# Altium PCB DAP-PCB-REV-2.PcbDoc (part 2 of 4)
Units mil, origin at the board's own origin, x right, y up, seen from the top; angles counter-clockwise.
Board outline 2165.35 x 2165.35 mil, 6 copper layers (Top Layer (Sig), L2 (GND), L3 (Sig), L4 (Sig), L5 (GND), Bottom Layer (Sig)), stack 34.252 mil thick; 270 components, 172 nets, 891 pads, 299 vias.
Unrouted connection lines stored in the file: 138.
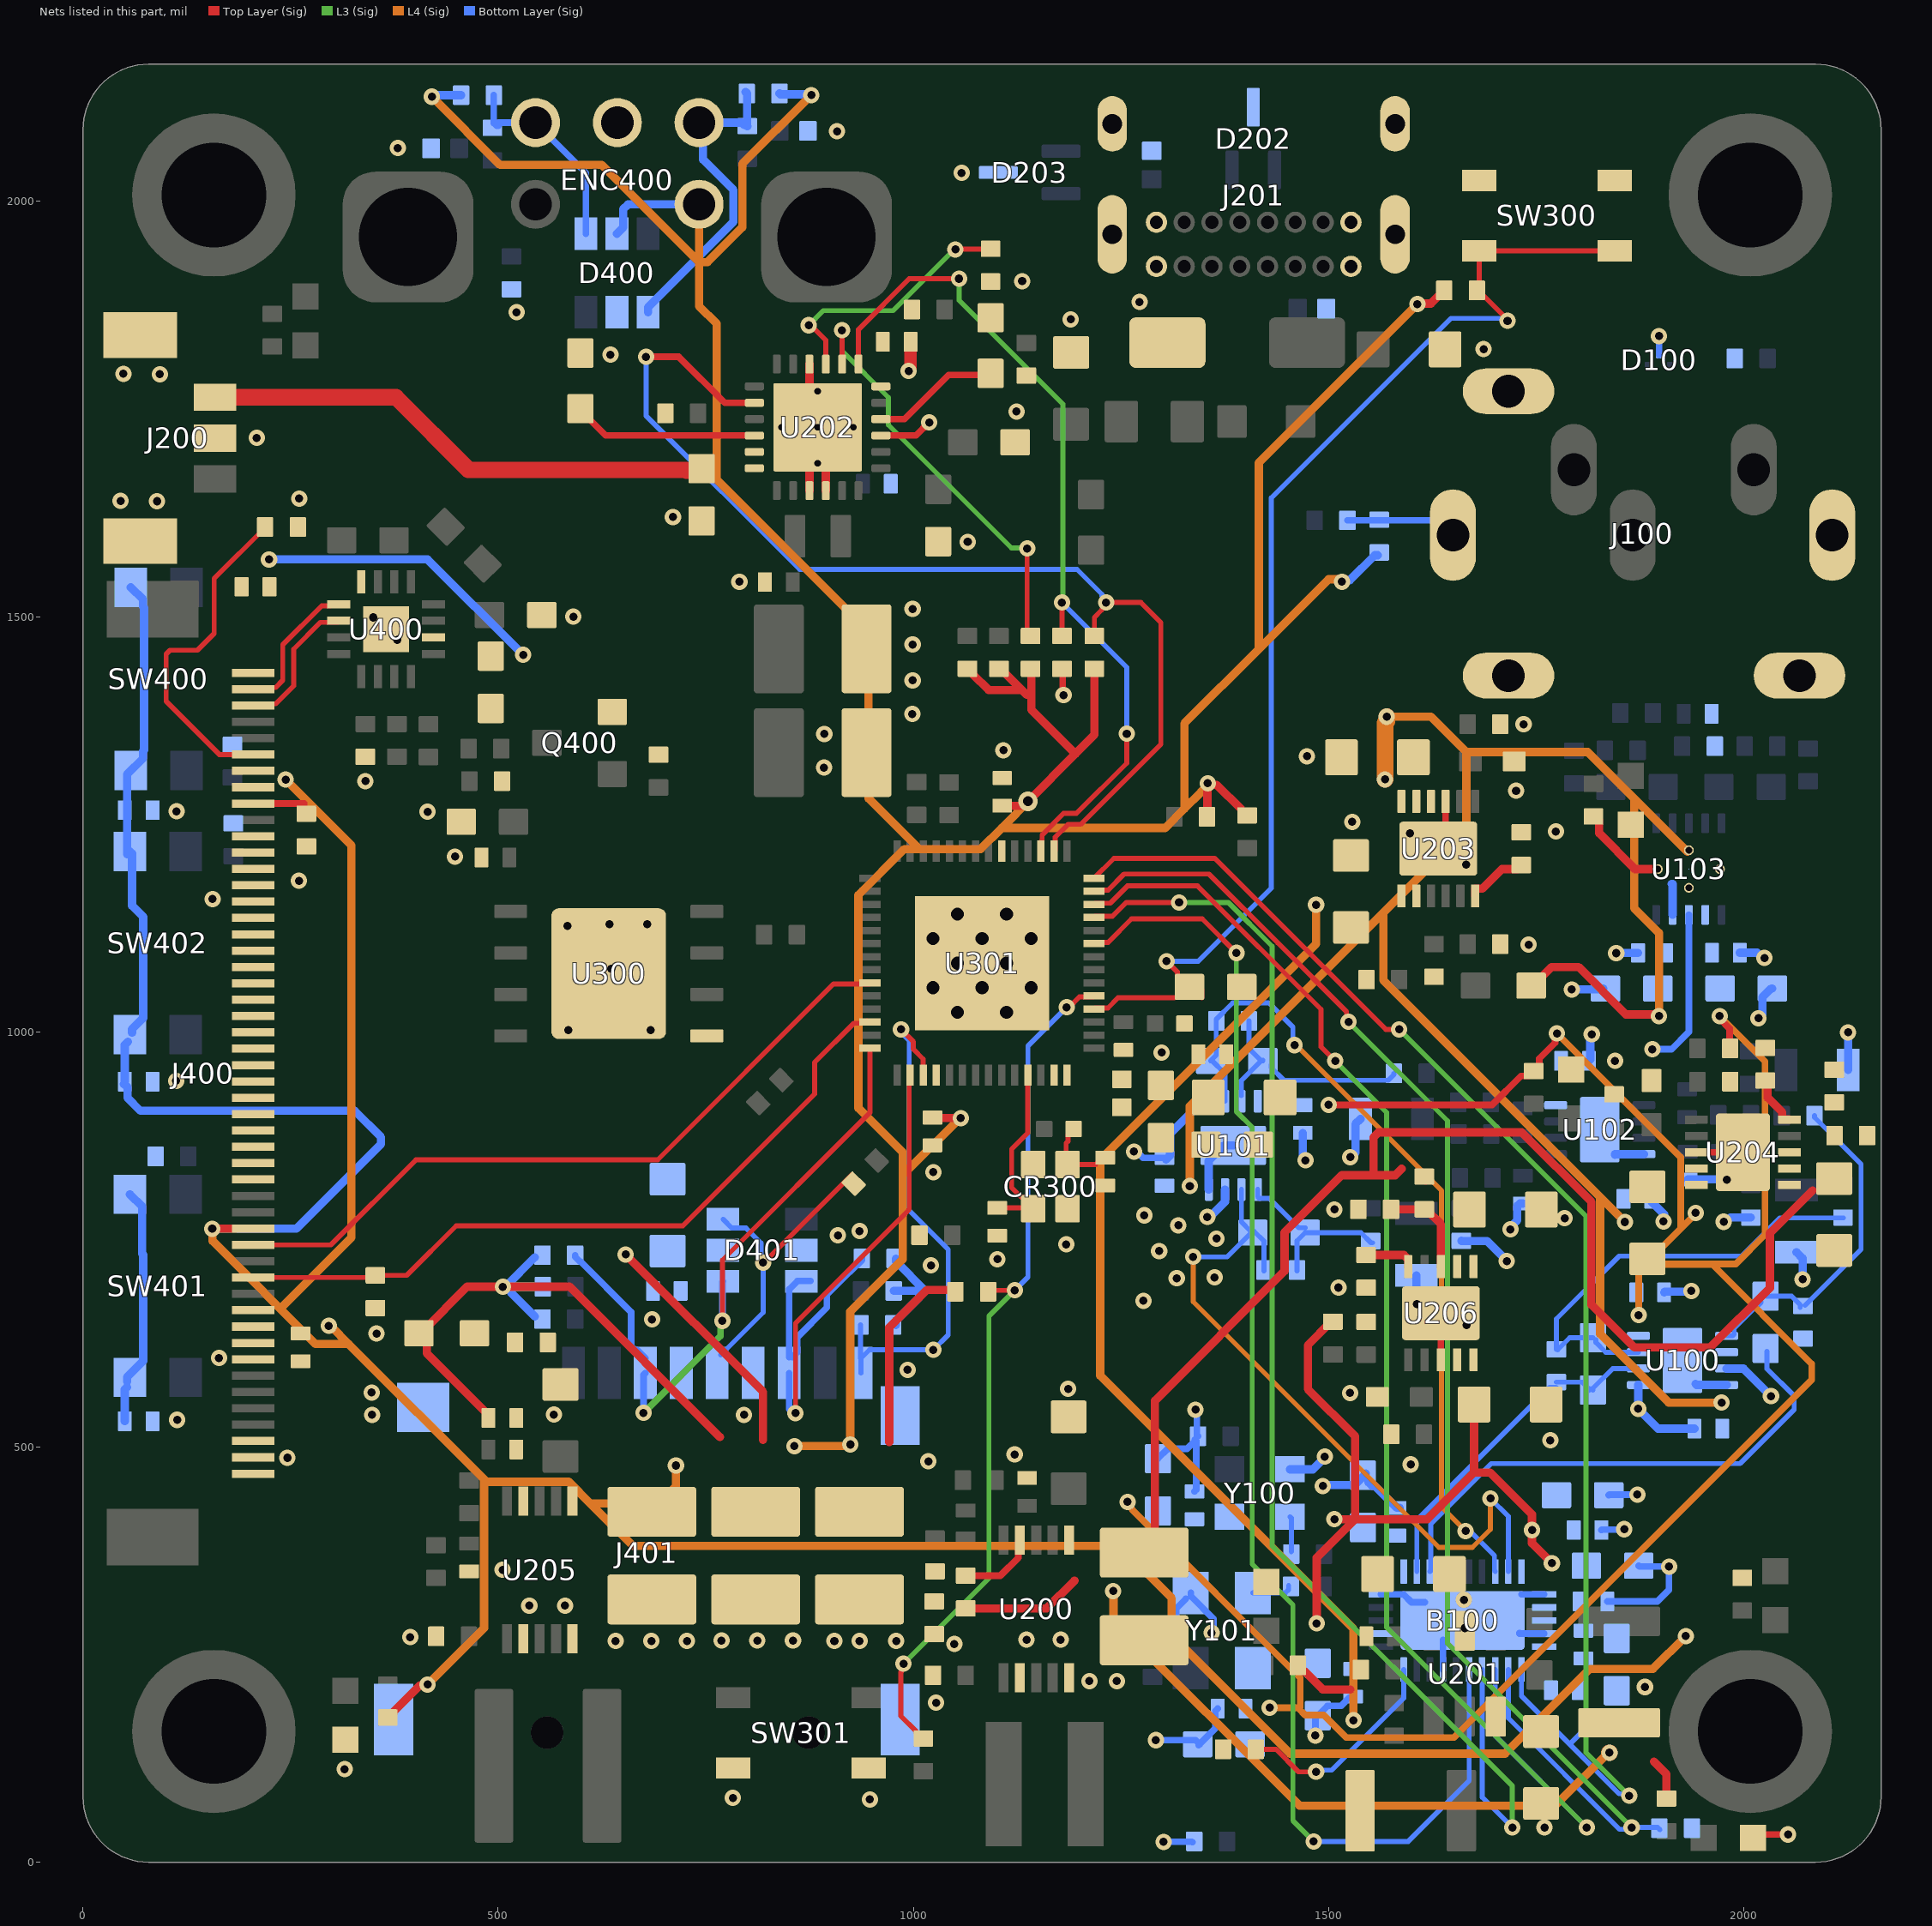
[diagram p6: the nets of this part, all layers, seen from the top]

## Part data (continued)
C300 C404 C405: library part #1-040, <Rating>=16V, <Tolerance>=0.1, <Value>=10nF, Manufacturer 1=YAGEO, Manufacturer Part Number 1=CC0402KRX7R7BB103, Supplier Part Number 1=311-1042-2-ND, <Footprint>=0402, <Spec>=X7R, <Termination>=SMD, AL-PN=#1-040, Creator Project=aRTy, Lead Time="21 Weeks", PartType=Capacitor, Status=Verified, SubType=Ceramic, Supplier 1=Digikey, Supplier Label="10000 pF ±10% 16V Ceramic Capacitor X7R 0402 (1005 Metric)", Type=Standard
C308 C310: library part #1-122, <Rating>=50V, <Tolerance>=0.01, <Value>=12pF, Manufacturer 1="Murata Electronics", Manufacturer Part Number 1=GJM1555C1H120FB01D, Supplier Part Number 1=490-11190-1-ND, <Footprint>=0402, <Spec>=C0G, <Termination>=SMD, AL-PN=#1-122, Creator Project=DAP, Lead Time="17 Weeks", PartType=Capacitor, Status=Verified, SubType=Ceramic, Supplier 1=Digikey, Supplier Label="12 pF ±1% 50V Ceramic Capacitor C0G, NP0 0402 (1005 Metric)", Type=Standard
CR300: library part #1-118, <Rating>=10pF, <Value>="40 MHz", Manufacturer 1="ECS Inc.", Manufacturer Part Number 1=ECS-400-10-37B2-CKY-TR, Supplier Part Number 1=50-ECS-400-10-37B2-CKY-TRCT-ND, <Spec>=40Ohm, <Termination>=SMD, AL-PN=#1-118, Creator Project=DAP, Lead Time=N/A, PartType=Crystal, Status=Verified, Supplier 1=Digikey, Supplier Label="40 MHz ±10ppm Crystal 12pF 40 Ohms 4-SMD, No Lead", Type=Standard
D100: library part #1-112, <Rating>=0.2pF, <Value>=8.4V(Cl), Manufacturer 1="Texas Instruments", Manufacturer Part Number 1=ESD122DMXR, Supplier Part Number 1=296-48543-1-ND, <Termination>=SMD, AL-PN=#1-112, Creator Project=DAP, Lead Time="9 Weeks", PartType=Diode, Status=Verified, SubType=TVS, Supplier 1=Digikey, Supplier Label="8.4V (Typ) Clamp 2.5A (8/20µs) Ipp Tvs Diode Surface Mount 3-X2SON (1x0.6)", Type=Standard
D200 D204 D205 D206 D207 D208 D209: library part #1-009, <Rating>=30mA, <Value>=2.1V, Manufacturer 1="Lite-On Inc", Manufacturer Part Number 1=LTST-C190GKT, Supplier Part Number 1=160-LTST-C190GKTTR-ND, <Spec>=GREEN, <Termination>=SMD, AL-PN=#1-009, Creator Project=Bootcamp, Lead Time="14 Weeks", PartType=Diode, Status=Verified, SubType=LED, Supplier 1=Digikey, Supplier Label="Green 569nm LED Indication - Discrete 2.1V 0603 (1608 Metric)", Type=Standard
D201: library part #1-049, <Rating>=7.78V(Bd), <Value>=12V(Cl), Manufacturer 1="Diodes Incorporated", Manufacturer Part Number 1=SMAJ7.0A-13-F, Supplier Part Number 1=SMAJ7.0A-FDICT-ND, <Spec>=7V(Rv), <Termination>=SMD, AL-PN=#1-049, Creator Project=aRTy, Lead Time="12 Weeks", PartType=Diode, Status=Verified, SubType=TVS, Supplier 1=Digikey, Supplier Label="12V Clamp 33.3A Ipp Tvs Diode Surface Mount SMA", Type=Standard
D202 D203: library part #1-099, <Rating>=1.5pF, <Value>=12.4V(Cl), Manufacturer 1="Texas Instruments", Manufacturer Part Number 1=TPD2E2U06QDCKRQ1, Supplier Part Number 1=296-44302-1-ND, <Spec>=20kV, <Termination>=SMD, AL-PN=#1-099, Creator Project=DAP, Lead Time="9 Weeks", PartType=Diode, Status=Verified, SubType=TVS, Supplier 1=Digikey, Supplier Label="12.4V (Typ) Clamp 5.5A (8/20µs) Ipp Tvs Diode Surface Mount SC-70-3", Type=Standard
D400 D401: library part #1-127, <Rating>=12A, <Value>=5V(RWM), Manufacturer 1="Good-Ark Semiconductor", Manufacturer Part Number 1=GSER5U007, Supplier Part Number 1=4786-GSER5U007CT-ND, <Termination>=SMD, AL-PN=#1-127, Creator Project=DAP, Lead Time="16 Weeks", PartType=Diode, Status=Verified, SubType=TVS, Supplier 1=Digikey, Supplier Label="25V Clamp 12A (8/20µs) Ipp Tvs Diode Surface Mount SOT-23-6L", Type=Standard
ENC400: library part #1-135, Manufacturer 1="TT Electronics", Manufacturer Part Number 1=EN12-VS11AF18, Supplier Part Number 1=987-1198-ND, <Termination>=Thru, AL-PN=#1-135, Creator Project=DAP, Lead Time="34 Weeks", PartType=Encoder, Status=Verified, SubType=Quadrature, Supplier 1=Digikey, Supplier Label="Rotary Encoder Mechanical 12 Quadrature (Incremental) Right Angle", Type=Standard
FB200: library part #1-068, <Rating>=3A, <Value>=120Ohm, Manufacturer 1="Würth Elektronik", Manufacturer Part Number 1=742792023, Supplier Part Number 1=732-1613-1-ND, <Footprint>=0805, <Termination>=SMD, AL-PN=#1-068, Creator Project=DAP, Lead Time="33 Weeks", PartType=Misc, Status=Verified, SubType="Ferrite Bead", Supplier 1=Digikey, Supplier Label="120 Ohms @ 100 MHz 1 Signal Line Ferrite Bead 0805 (2012 Metric) 3A 30mOhm", Type=Standard
J100: library part #1-111, <Value>=3.5mm, Manufacturer 1="Same Sky", Manufacturer Part Number 1=SJ1-3535NS, Package=None, Supplier Part Number 1=CP1-3535NS-ND, <Termination>=Thru, AL-PN=#1-111, Check_prices=https://www.snapeda.com/parts/SJ1-3535NS/Same+Sky/view-part/?ref=eda, Creator Project=DAP, Lead Time="19 Weeks", MF="Same Sky", MP=SJ1-3535NS, PartType=Connector, SnapEDA_Link=https://www.snapeda.com/parts/SJ1-3535NS/Same+Sky/view-part/?ref=snap, Status=Verified, SubType=Audio, Supplier 1=Digikey, Supplier Label="3.50mm (0.141\", 1/8\", Mini Plug) - Headphone Phone Jack Stereo (3 Conductor, TRS) Connector Solder", Type=Standard
J200: library part #1-137, <Value>=3x1, Manufacturer 1=Molex, Manufacturer Part Number 1=5055670381, Package=None, Supplier Part Number 1=WM22227CT-ND, <Termination>=SMD, AL-PN=#1-137, Availability=Unavailable, Creator Project=DAP, Lead Time="19 Weeks", MF="{'manufacturer': u'Molex'}", MP=436500329, PartType=Connector, Price=None, Status=Verified, SubType=Header, Supplier 1=Digikey, Supplier Label="Connector Header Surface Mount, Right Angle 3 position 0.049\" (1.25mm)", Type=Standard
J201: library part #1-069, <Rating>=5A, <Value>=48V, Manufacturer 1=GCT, Manufacturer Part Number 1=USB4085-GF-A, Package=None, Supplier Part Number 1=2073-USB4085-GF-ACT-ND, <Spec>=USB-C, <Termination>=Thru, AL-PN=#1-069, Availability="In Stock", Check_prices=https://www.snapeda.com/parts/USB4085-GF-A/Global+Connector+Technology/view-part/?ref=eda, Creator Project=DAP, Lead Time="7 Weeks", MF="Global Connector Technology", MP=USB4085-GF-A, PartType=Connector, Price=None, Purchase-URL=https://pricing.snapeda.com/search/part/USB4085-GF-A/?ref=eda, SnapEDA_Link=https://www.snapeda.com/parts/USB4085-GF-A/Global+Connector+Technology/view-part/?ref=snap, Status=Verified, SubType=USB, Supplier 1=Digikey, Supplier Label="USB-C (USB TYPE-C) USB 2.0 Receptacle Connector 24 (16+8 Dummy) Position Through Hole, Right Angle", Type=Standard
J400: library part #1-117, <Value>=50-Pin, Manufacturer 1="Amphenol ICC", Manufacturer Part Number 1=F32D-1A7Y1-21050, Package=None, Supplier Part Number 1=609-F32D-1A7Y1-21050CT-ND, <Footprint>=R/A, <Termination>=SMD, AL-PN=#1-117, Check_prices=https://www.snapeda.com/parts/F32D-1A7Y1-21050/Amphenol+FCI/view-part/?ref=eda, Creator Project=DAP, Lead Time="13 Weeks", MF="Amphenol ICC (FCI)", MP=F32D-1A7Y1-21050, PartType=Connector, SnapEDA_Link=https://www.snapeda.com/parts/F32D-1A7Y1-21050/Amphenol+FCI/view-part/?ref=snap, Status=Verified, SubType=FFC, Supplier 1=Digikey, Supplier Label="50 Position FFC, FPC Connector Contacts, Top and Bottom 0.020\" (0.50mm) Surface Mount, Right Angle", Type=Standard
J401: library part #1-126, Manufacturer 1="Same Sky", Manufacturer Part Number 1=MSD-1-A, Package=None, Supplier Part Number 1=2223-MSD-1-ACT-ND, <Termination>=SMD, AL-PN=#1-126, Check_prices=https://www.snapeda.com/parts/MSD-1-A/Same+Sky/view-part/?ref=eda, Creator Project=DAP, Lead Time="8 Weeks", MF="Same Sky", MP=MSD-1-A, PartType=Connector, SnapEDA_Link=https://www.snapeda.com/parts/MSD-1-A/Same+Sky/view-part/?ref=snap, Status=Verified, SubType=Micro-SD, Supplier 1=Digikey, Supplier Label="9 (8 + 1) Position Card Connector microSD™ Surface Mount, Right Angle Gold", Type=Standard
L200: library part #1-076, <Rating>=3.5A, <Tolerance>=0.2, <Value>=6.8uH, Manufacturer 1="Bourns Inc.", Manufacturer Part Number 1=SRP4030FA-6R8M, Supplier Part Number 1=SRP4030FA-6R8MCT-ND, <Spec>=74.1mOhm, <Termination>=SMD, AL-PN=#1-076, Creator Project=DAP, Lead Time="22 Weeks", PartType=Inductor, Status=Verified, SubType=Shielded, Supplier 1=Digikey, Supplier Label="6.8 µH Shielded Drum Core, Wirewound Inductor 4 A 74.1mOhm Max Nonstandard", Type=Standard
L201 L202: library part #1-090, <Rating>=400mA, <Tolerance>=0.2, <Value>=22uH, Manufacturer 1="Murata Electronics", Manufacturer Part Number 1=490-LQW32FT220M2HLTR, Supplier Part Number 1=490-LQW32FT220M2HLCT-ND, <Footprint>=1210, <Spec>=810mOhm, <Termination>=SMD, AL-PN=#1-090, Creator Project=DAP, Lead Time="25 Weeks", PartType=Inductor, Status=Verified, SubType=Shielded, Supplier 1=Digikey, Supplier Label="22 µH Shielded Wirewound Inductor 300 mA 810mOhm Max 1210 (3225 Metric)", Type=Standard
L203: library part #1-063, <Rating>=2A, <Tolerance>=0.2, <Value>=1.0uH, Manufacturer 1=TDK, Manufacturer Part Number 1=TFM141206BLE-1R0MTCA, Supplier Part Number 1=445-TFM141206BLE-1R0MTCACT-ND, <Footprint>=0505, <Spec>=96mOhm, <Termination>=SMD, AL-PN=#1-063, Creator Project=DAP, Lead Time="20 Weeks", PartType=Inductor, Status=Verified, SubType=Shielded, Supplier 1=Digikey, Supplier Label="1 µH Shielded Thin Film Inductor 2 A 96mOhm Max 0505 (1412 Metric)", Type=Standard
L204: library part #1-094, <Rating>=3.7A, <Tolerance>=0.2, <Value>=18uH, Manufacturer 1=Coilcraft, Manufacturer Part Number 1=XGL5050-183MEC, Supplier Part Number 1=2457-XGL5050-183MEC-ND, <Spec>=62.5mOhm, <Termination>=SMD, AL-PN=#1-094, Creator Project=DAP, Lead Time=N/A, PartType=Inductor, Status=Verified, SubType=Shielded, Supplier 1=Digikey, Supplier Label="18 µH Shielded Molded Inductor 4.5 A 62.5mOhm Max Nonstandard", Type=Standard
L300: library part #1-121, <Rating>=1A, <Value>=2nH, Manufacturer 1=TDK, Manufacturer Part Number 1=MHQ1005075HA2N0BTD25, Supplier Part Number 1=445-MHQ1005075HA2N0BTD25CT-ND, <Footprint>=0402, <Spec>=50mOhm, <Termination>=SMD, AL-PN=#1-121, Creator Project=DAP, Lead Time="12 Weeks", PartType=Inductor, Status=Verified, SubType=Shielded, Supplier 1=Digikey, Supplier Label="2 nH Shielded Multilayer Inductor 1 A 50mOhm Max 0402 (1005 Metric)", Type=Standard
L301: library part #1-120, <Rating>=250mA, <Tolerance>=0.03, <Value>=24nH, Manufacturer 1=TDK, Manufacturer Part Number 1=MHQ1005075HA24NHTD25, Supplier Part Number 1=445-MHQ1005075HA24NHTD25CT-ND, <Footprint>=0402, <Spec>=700mOhm, <Termination>=SMD, AL-PN=#1-120, Creator Project=DAP, Lead Time="12 Weeks", PartType=Inductor, Status=Verified, SubType=Shielded, Supplier 1=Digikey, Supplier Label="24 nH Shielded Multilayer Inductor 250 mA 700mOhm Max 0402 (1005 Metric)", Type=Standard
Q400: library part #1-130, <Rating>=2.5Vgs, <Value>=N-Type, Manufacturer 1=MCC, Manufacturer Part Number 1=2N7002-TP, Package="TO-236 MCC", Supplier Part Number 1=2N7002-TPMSCT-ND, <Termination>=SMD, AL-PN=#1-130, Check_prices=https://www.snapeda.com/parts/2N7002-TP/Micro+Commercial/view-part/?ref=eda, Creator Project=DAP, Lead Time=N/A, MF="Micro Commercial", MP=2N7002-TP, PartType=Transistor, SnapEDA_Link=https://www.snapeda.com/parts/2N7002-TP/Micro+Commercial/view-part/?ref=snap, Status=Verified, SubType=MOSFET, Supplier 1=Digikey, Supplier Label="N-Channel 60 V 115mA (Ta) 1.08W Surface Mount SOT-23", Type=Standard
R100 R101 R102 R103 R116 R117 R121 R123 R131 R134: library part #1-105, <Rating>=1/16W, <Tolerance>=0.001, <Value>=499Ohm, Manufacturer 1=YAGEO, Manufacturer Part Number 1=RT0402BRD07499RL, Supplier Part Number 1=YAG1440CT-ND, <Footprint>=0402, <Termination>=SMD, AL-PN=#1-105, Creator Project=DAP, Lead Time="23 Weeks", PartType=Resistor, Status=Verified, Supplier 1=Digikey, Supplier Label="499 Ohms ±0.1% 0.063W, 1/16W Chip Resistor 0402 (1005 Metric) Thin Film", Type=Standard
R104 R105 R303 R304 R305 R306 R307: library part #1-102, <Rating>=1/16W, <Tolerance>=0.01, <Value>=22Ohm, Manufacturer 1=YAGEO, Manufacturer Part Number 1=RC0402FR-0722RL, Supplier Part Number 1=311-22.0LRCT-ND, <Footprint>=0402, <Termination>=SMD, AL-PN=#1-102, Creator Project=DAP, Lead Time="22 Weeks", PartType=Resistor, Status=Verified, Supplier 1=Digikey, Supplier Label="22 Ohms ±1% 0.063W, 1/16W Chip Resistor 0402 (1005 Metric) Moisture Resistant Thick Film", Type=Standard
R106 R107 R111 R112 R113 R119 R129 R135 R208 R209 R210 R211 R216 R221 R223 R242 R300 R301 R400 R401 R402 R403 R404 R405 R406 R407 R408 R412 R413 R414 R415 R416 R417 R418 R419 R422: library part #1-134, <Tolerance>=0.01, <Value>=10kOhm, Manufacturer 1=YAGEO, Manufacturer Part Number 1=AC0402FR-0710KL, Supplier Part Number 1=YAG3436CT-ND, <Footprint>=0402, <Termination>=SMD, AL-PN=#1-134, Creator Project=DAP, Lead Time="22 Weeks", PartType=Resistor, Status=Verified, Supplier 1=Digikey, Supplier Label="10 kOhms ±1% 0.063W, 1/16W Chip Resistor 0402 (1005 Metric) Automotive AEC-Q200, Moisture Resistant Thick Film", Type=Standard
R108 R207 R226 R231 R238 R247: library part #1-138, <Tolerance>=0.001, <Value>=49.9kOhm, Manufacturer 1=YAGEO, Manufacturer Part Number 1=RT0402BRD0749K9L, Supplier Part Number 1=YAG4270CT-ND, <Footprint>=0402, <Termination>=SMD, AL-PN=#1-138, Creator Project=DAP, Lead Time="23 Weeks", PartType=Resistor, Status=Verified, Supplier 1=Digikey, Supplier Label="49.9 kOhms ±0.1% 0.063W, 1/16W Chip Resistor 0402 (1005 Metric) Thin Film", Type=Standard
R114 R115 R126 R133: library part #1-109, <Rating>=1/16W, <Tolerance>=0.001, <Value>=220Ohm, Manufacturer 1=YAGEO, Manufacturer Part Number 1=RT0402BRD07220RL, Supplier Part Number 1=YAG4207CT-ND, <Footprint>=0402, <Termination>=SMD, AL-PN=#1-109, Creator Project=DAP, Lead Time="23 Weeks", PartType=Resistor, Status=Verified, Supplier 1=Digikey, Supplier Label="220 Ohms ±0.1% 0.063W, 1/16W Chip Resistor 0402 (1005 Metric) Thin Film", Type=Standard
R118 R204 R205 R212 R228 R239 R240 R241 R245 R420 R421 R424 R425: library part #1-131, <Tolerance>=0.01, <Value>=100kOhm, Manufacturer 1=YAGEO, Manufacturer Part Number 1=RT0402BRD07100KL, Supplier Part Number 1=YAG1343CT-ND, <Footprint>=0402, <Termination>=SMD, AL-PN=#1-131, Creator Project=DAP, Lead Time="23 Weeks", PartType=Resistor, Status=Verified, Supplier 1=Digikey, Supplier Label="100 kOhms ±0.1% 0.063W, 1/16W Chip Resistor 0402 (1005 Metric) Thin Film", Type=Standard
R120 R122 R124 R132: library part #1-110, <Rating>=1/16W, <Tolerance>=0.001, <Value>=681Ohm, Manufacturer 1=YAGEO, Manufacturer Part Number 1=RT0402BRD07681RL, Supplier Part Number 1=YAG1466CT-ND, <Footprint>=0402, <Termination>=SMD, AL-PN=#1-110, Creator Project=DAP, Lead Time="23 Weeks", PartType=Resistor, Status=Verified, Supplier 1=Digikey, Supplier Label="681 Ohms ±0.1% 0.063W, 1/16W Chip Resistor 0402 (1005 Metric) Thin Film", Type=Standard
R125 R127: library part #1-113, <Rating>=1/16W, <Tolerance>=0.001, <Value>=4.7Ohm, Manufacturer 1=YAGEO, Manufacturer Part Number 1=RT0402BRE074R7L, Supplier Part Number 1=13-RT0402BRE074R7LCT-ND, <Footprint>=0402, <Termination>=SMD, AL-PN=#1-113, Creator Project=DAP, Lead Time="23 Weeks", PartType=Resistor, Status=Verified, Supplier 1=Digikey, Supplier Label="4.7 Ohms ±0.1% 0.063W, 1/16W Chip Resistor 0402 (1005 Metric) Thin Film", Type=Standard
R128 R203 R237: library part #1-079, <Rating>=1/16W, <Tolerance>=0.001, <Value>=54.9kOhm, Manufacturer 1=YAGEO, Manufacturer Part Number 1=RT0402BRD0754K9L, Supplier Part Number 1=YAG1452CT-ND, <Footprint>=0402, <Termination>=SMD, AL-PN=#1-079, Creator Project=DAP, Lead Time="20 Weeks", PartType=Resistor, Status=Verified, Supplier 1=Digikey, Supplier Label="54.9 kOhms ±0.1% 0.063W, 1/16W Chip Resistor 0402 (1005 Metric) Thin Film", Type=Standard
R200: library part #1-074, <Rating>=1/16W, <Tolerance>=0.001, <Value>=220kOhm, Manufacturer 1=YAGEO, Manufacturer Part Number 1=RC0402BR-07220KL, Supplier Part Number 1=13-RC0402BR-07220KLCT-ND, <Footprint>=0402, <Termination>=SMD, AL-PN=#1-074, Creator Project=DAP, Lead Time="17 Weeks", PartType=Resistor, Status=Verified, Supplier 1=Digikey, Supplier Label="220 kOhms ±0.1% 0.063W, 1/16W Chip Resistor 0402 (1005 Metric) Moisture Resistant Thick Film", Type=Standard
R201: library part #1-091, <Rating>=1/16W, <Tolerance>=0.001, <Value>=309kOhm, Manufacturer 1=YAGEO, Manufacturer Part Number 1=RE0402BRE07309KL, Supplier Part Number 1=13-RE0402BRE07309KLCT-ND, <Footprint>=0402, <Termination>=SMD, AL-PN=#1-091, Creator Project=DAP, Lead Time="20 Weeks", PartType=Resistor, Status=Verified, Supplier 1=Digikey, Supplier Label="309 kOhms ±0.1% 0.063W, 1/16W Chip Resistor 0402 (1005 Metric) Thick Film", Type=Standard
R202: library part #1-067, <Rating>=0.1W, <Tolerance>=0.005, <Value>=274kOhm, Manufacturer 1=YAGEO, Manufacturer Part Number 1=RT0603DRE07274KL, Supplier Part Number 1=13-RT0603DRE07274KLCT-ND, <Footprint>=0603, <Termination>=SMD, AL-PN=#1-067, Creator Project=DAP, Lead Time="20 Weeks", PartType=Resistor, Status=Verified, Supplier 1=Digikey, Supplier Label="RES SMD 274K OHM 0.5% 1/10W 0603", Type=Standard
R206 R229 R246 R249 R250 R251 R252 R253 R302: library part #1-043, <Rating>=1/16W, <Tolerance>=0.001, <Value>=1kOhm, Manufacturer 1=YAGEO, Manufacturer Part Number 1=RT0402BRD071KL, Supplier Part Number 1=YAG1386TR-ND, <Footprint>=0402, <Termination>=SMD, AL-PN=#1-043, Creator Project=aRTy, Lead Time="20 Weeks", PartType=Resistor, Status=Verified, Supplier 1=Digikey, Supplier Label="1 kOhms ±0.1% 0.063W, 1/16W Chip Resistor 0402 (1005 Metric) Thin Film", Type=Standard
R213 R224: library part #1-078, <Rating>=1/16W, <Tolerance>=0.001, <Value>=15kOhm, Manufacturer 1=YAGEO, Manufacturer Part Number 1=RT0402BRD0715KL, Supplier Part Number 1=YAG2302CT-ND, <Footprint>=0402, <Termination>=SMD, AL-PN=#1-078, Creator Project=DAP, Lead Time="20 Weeks", PartType=Resistor, Status=Verified, Supplier 1=Digikey, Supplier Label="15 kOhms ±0.1% 0.063W, 1/16W Chip Resistor 0402 (1005 Metric) Thin Film", Type=Standard
R214: library part #1-060, <Rating>=1/16W, <Tolerance>=0.01, <Value>=5kOhm, Manufacturer 1=YAGEO, Manufacturer Part Number 1=RC0402FR-075KL, Supplier Part Number 1=13-RC0402FR-075KLCT-ND, <Footprint>=0402, <Termination>=SMD, AL-PN=#1-060, Creator Project=DAP, Lead Time="17 Weeks", PartType=Resistor, Status=Verified, Supplier 1=Digikey, Supplier Label="5 kOhms ±1% 0.063W, 1/16W Chip Resistor 0402 (1005 Metric) Moisture Resistant Thick Film", Type=Standard
R215: library part #1-061, <Rating>=1/16W, <Tolerance>=0.005, <Value>=9.88kOhm, Manufacturer 1=YAGEO, Manufacturer Part Number 1=RT0402DRD079K88L, Supplier Part Number 1=311-2214-1-ND, <Footprint>=0402, <Termination>=SMD, AL-PN=#1-061, Creator Project=DAP, Lead Time="20 Weeks", PartType=Resistor, Status=Verified, Supplier 1=Digikey, Supplier Label="9.88 kOhms ±0.5% 0.063W, 1/16W Chip Resistor 0402 (1005 Metric) Thin Film", Type=Standard
R217: library part #1-065, <Rating>=0.1W, <Tolerance>=0.01, <Value>=270Ohm, Manufacturer 1=YAGEO, Manufacturer Part Number 1=RC0603FR-07270RL, Supplier Part Number 1=311-270HRCT-ND, <Footprint>=0603, <Termination>=SMD, AL-PN=#1-065, Creator Project=DAP, Lead Time="17 Weeks", PartType=Resistor, Status=Verified, Supplier 1=Digikey, Supplier Label="270 Ohms ±1% 0.1W, 1/10W Chip Resistor 0603 (1608 Metric) Moisture Resistant Thick Film", Type=Standard
R218: library part #1-064, <Rating>=0.1W, <Tolerance>=0.001, <Value>=500Ohm, Manufacturer 1=YAGEO, Manufacturer Part Number 1=RT0603BRC07500RL, Supplier Part Number 1=13-RT0603BRC07500RLCT-ND, <Footprint>=0603, <Termination>=SMD, AL-PN=#1-064, Creator Project=DAP, Lead Time="20 Weeks", PartType=Resistor, Status=Verified, Supplier 1=Digikey, Supplier Label="500 Ohms ±0.1% 0.1W, 1/10W Chip Resistor 0603 (1608 Metric) Thin Film", Type=Standard
R219: library part #1-087, <Rating>=1/16W, <Tolerance>=0.01, <Value>=88.7kOhm, Manufacturer 1=YAGEO, Manufacturer Part Number 1=RC0402FR-0788K7L, Supplier Part Number 1=311-88.7KLRCT-ND, <Footprint>=0402, <Termination>=SMD, AL-PN=#1-087, Creator Project=DAP, Lead Time="17 Weeks", PartType=Resistor, Status=Verified, Supplier 1=Digikey, Supplier Label="88.7 kOhms ±1% 0.063W, 1/16W Chip Resistor 0402 (1005 Metric) Moisture Resistant Thick Film", Type=Standard
R220: library part #1-086, <Rating>=1/10W, <Tolerance>=0.001, <Value>=135kOhm, Manufacturer 1=YAGEO, Manufacturer Part Number 1=RT0603BRD07135KL, Supplier Part Number 1=13-RT0603BRD07135KLCT-ND, <Footprint>=0603, <Termination>=SMD, AL-PN=#1-086, Creator Project=DAP, Lead Time="20 Weeks", PartType=Resistor, Status=Verified, Supplier 1=Digikey, Supplier Label="135 kOhms ±0.1% 0.1W, 1/10W Chip Resistor 0603 (1608 Metric) Thin Film", Type=Standard
R222 R243: library part #1-083, <Rating>=1/16W, <Tolerance>=0.01, <Value>=909kOhm, Manufacturer 1=YAGEO, Manufacturer Part Number 1=RC0402FR-07909KL, Supplier Part Number 1=YAG2377CT-ND, <Footprint>=0402, <Termination>=SMD, AL-PN=#1-083, Creator Project=DAP, Lead Time="17 Weeks", PartType=Resistor, Status=Verified, Supplier 1=Digikey, Supplier Label="909 kOhms ±1% 0.063W, 1/16W Chip Resistor 0402 (1005 Metric) Moisture Resistant Thick Film", Type=Standard
R225 R244: library part #1-084, <Rating>=1/16W, <Tolerance>=0.001, <Value>=90.9kOhm, Manufacturer 1=YAGEO, Manufacturer Part Number 1=RT0402BRD0790K9L, Supplier Part Number 1=YAG1489CT-ND, <Footprint>=0402, <Termination>=SMD, AL-PN=#1-084, Creator Project=DAP, Lead Time="20 Weeks", PartType=Resistor, Status=Verified, Supplier 1=Digikey, Supplier Label="90.9 kOhms ±0.1% 0.063W, 1/16W Chip Resistor 0402 (1005 Metric) Thin Film", Type=Standard
R227: library part #1-097, <Rating>=1/4W, <Tolerance>=0.01, <Value>=0.5Ohms, Manufacturer 1=YAGEO, Manufacturer Part Number 1=PE0805FRF7W0R5L, Supplier Part Number 1=13-PE0805FRF7W0R5LCT-ND, <Footprint>=0805, <Termination>=SMD, AL-PN=#1-097, Creator Project=DAP, Lead Time="20 Weeks", PartType=Resistor, Status=Verified, Supplier 1=Digikey, Supplier Label="500 mOhms ±1% 0.25W, 1/4W Chip Resistor 0805 (2012 Metric) Automotive AEC-Q200, Current Sense Metal Film", Type=Standard
R230: library part #1-088, <Rating>=1/16W, <Tolerance>=0.01, <Value>=15.4kOhm, Manufacturer 1=YAGEO, Manufacturer Part Number 1=RT0402BRD0715K4L, Supplier Part Number 1=YAG4177CT-ND, <Footprint>=0402, <Termination>=SMD, AL-PN=#1-088, Creator Project=DAP, Lead Time="20 Weeks", PartType=Resistor, Status=Verified, Supplier 1=Digikey, Supplier Label="15.4 kOhms ±0.1% 0.063W, 1/16W Chip Resistor 0402 (1005 Metric) Thin Film", Type=Standard
R232 R233 R248: library part #1-085, <Rating>=1/16W, <Tolerance>=0.001, <Value>=33.2kOhm, Manufacturer 1=YAGEO, Manufacturer Part Number 1=RT0402BRD0733K2L, Supplier Part Number 1=YAG4244CT-ND, <Footprint>=0402, <Termination>=SMD, AL-PN=#1-085, Creator Project=DAP, Lead Time="20 Weeks", PartType=Resistor, Status=Verified, Supplier 1=Digikey, Supplier Label="33.2 kOhms ±0.1% 0.063W, 1/16W Chip Resistor 0402 (1005 Metric) Thin Film", Type=Standard
R234 R235: library part #1-024, <Rating>=1/16W, <Tolerance>=0.001, <Value>=5.1kOhm, Manufacturer 1=YAGEO, Manufacturer Part Number 1=RT0402BRE075K1L, Supplier Part Number 1=YAG4404TR-ND, <Footprint>=0402, <Termination>=SMD, AL-PN=#1-024, Creator Project=aRTy, Lead Time="20 Weeks", PartType=Resistor, Status=Verified, Supplier 1=Digikey, Supplier Label="5.1 kOhms ±0.1% 0.063W, 1/16W Chip Resistor 0402 (1005 Metric) Thin Film", Type=Standard
R236: library part #1-095, <Rating>=1/10W, <Tolerance>=0.001, <Value>=172kOhm, Manufacturer 1=YAGEO, Manufacturer Part Number 1=RT0603BRD07172KL, Supplier Part Number 1=13-RT0603BRD07172KLCT-ND, <Footprint>=0603, <Termination>=SMD, AL-PN=#1-095, Creator Project=DAP, Lead Time="20 Weeks", PartType=Resistor, Status=Verified, Supplier 1=Digikey, Supplier Label="172 kOhms ±0.1% 0.1W, 1/10W Chip Resistor 0603 (1608 Metric) Thin Film", Type=Standard
R308: library part #1-123, <Rating>=1/16W, <Tolerance>=0.001, <Value>=1MOhm, Manufacturer 1=YAGEO, Manufacturer Part Number 1=RE0402BRE071ML, Supplier Part Number 1=13-RE0402BRE071MLCT-ND, <Footprint>=0402, <Termination>=SMD, AL-PN=#1-123, Creator Project=DAP, Lead Time="20 Weeks", PartType=Resistor, Status=Verified, Supplier 1=Digikey, Supplier Label="1 MOhms ±0.1% 0.063W, 1/16W Chip Resistor 0402 (1005 Metric) Thick Film", Type=Standard
R423: library part #1-133, <Tolerance>=0.01, <Value>=32.4kOhm, Manufacturer 1=YAGEO, Manufacturer Part Number 1=RC0402FR-0732K4L, Supplier Part Number 1=YAG3119CT-ND, <Footprint>=0402, <Termination>=SMD, AL-PN=#1-133, Creator Project=DAP, Lead Time="22 Weeks", PartType=Resistor, Status=Verified, Supplier 1=Digikey, Supplier Label="32.4 kOhms ±1% 0.063W, 1/16W Chip Resistor 0402 (1005 Metric) Moisture Resistant Thick Film", Type=Standard
SW300 SW301: library part #1-115, <Value>=SPST, Manufacturer 1=C&K, Manufacturer Part Number 1="PTS810SJM250SMTR LFS", Package=None, Supplier Part Number 1=CKN10502CT-ND, <Footprint>=Vert, <Termination>=SMD, AL-PN=#1-115, Check_prices=https://www.snapeda.com/parts/PTS810%20SJM%20250%20SMTR%20LFS/C%2526K/view-part/?ref=eda, Creator Project=DAP, Lead Time="16 Weeks", MF=C&K, MP="PTS810 SJM 250 SMTR LFS", PartType=Switch, SnapEDA_Link=https://www.snapeda.com/parts/PTS810%20SJM%20250%20SMTR%20LFS/C%2526K/view-part/?ref=snap, Status=Verified, SubType=Tacticle, Supplier 1=Digikey, Supplier Label="Tactile Switch SPST-NO Top Actuated Surface Mount", Type=Standard
SW400 SW401 SW402: library part #1-114, <Value>=SPST, Manufacturer 1=E-Switch, Manufacturer Part Number 1=TL1014BF220QG, Supplier Part Number 1=141-TL1014BF220QGCT-ND, <Footprint>=R/A, <Termination>=SMD, AL-PN=#1-114, Creator Project=DAP, Lead Time="7 Weeks", PartType=Switch, Status=Verified, SubType=Tacticle, Supplier 1=Digikey, Supplier Label="Tactile Switch SPST-NO Side Actuated Surface Mount, Right Angle", Type=Standard
U100 U101 U102: library part #1-104, Manufacturer 1="Texas Instruments", Manufacturer Part Number 1=OPA1612AIDRGR, Supplier Part Number 1=296-38367-1-ND, <Termination>=SMD, AL-PN=#1-104, Creator Project=DAP, Lead Time="16 Weeks", PartType=IC, Status=Verified, SubType=Op-Amp, Supplier 1=Digikey, Supplier Label="Audio Amplifier 2 Circuit Rail-to-Rail 8-SON (3x3)", Type=Standard
U103: library part #1-056, Manufacturer 1="Texas Instruments", Manufacturer Part Number 1=OPA1622IDRCR, Package="VSON-10 Texas Instruments", Supplier Part Number 1=296-45038-1-ND, <Termination>=SMD, AL-PN=#1-056, Check_prices=https://www.snapeda.com/parts/OPA1622IDRCR/Texas+Instruments/view-part/?ref=eda, Creator Project=DAP, Lead Time="16 Weeks", MF="Texas Instruments", MP=OPA1622IDRCR, PartType=IC, SnapEDA_Link=https://www.snapeda.com/parts/OPA1622IDRCR/Texas+Instruments/view-part/?ref=snap, Status=Verified, SubType=Op-Amp, Supplier 1=Digikey, Supplier Label="Audio Amplifier 2 Circuit 10-VSON (3x3)", Type=Standard
U200 U205: library part #1-050, Manufacturer 1="Analog Devices", Manufacturer Part Number 1=LTC3440EMS#TRPBF, Package="MSOP-10 Linear Technology", Supplier Part Number 1=LTC3440EMS#TRPBFCT-ND, <Termination>=SMD, AL-PN=#1-050, Check_prices=https://www.snapeda.com/parts/LTC3440EMS%23TRPBF/Analog+Devices/view-part/?ref=eda, Creator Project=DAP, Lead Time="21 Weeks", MF="Analog Devices", MP=LTC3440EMS#TRPBF, PartType=IC, SnapEDA_Link=https://www.snapeda.com/parts/LTC3440EMS%23TRPBF/Analog+Devices/view-part/?ref=snap, Status=Verified, SubType=Buck-Boost, Supplier 1=Digikey, Supplier Label="Buck-Boost Switching Regulator IC Positive Adjustable 2.5V 1 Output 600mA 10-TFSOP, 10-MSOP (0.118\", 3.00mm Width)", Type=Standard
U201: library part #1-089, Manufacturer 1="Analog Devices", Manufacturer Part Number 1=LT3462AES6#TRPBF, Manufacturer_Name="Analog Devices Inc", Manufacturer_Part_Number=LT3093EDD#TRPBF, Supplier Part Number 1=LT3462AES6#TRPBFCT-ND, <Termination>=SMD, AL-PN=#1-089, Copyright="Copyright (C) 2026 Ultra Librarian. All rights reserved.", Creator Project=DAP, Lead Time="10 Weeks", PartType=IC, RefDes=RefDes, Status=Verified, SubType=Regulator, Supplier 1=Digikey, Supplier Label="Cuk Switching Regulator IC Negative Adjustable -1.265V 1 Output 250mA SOT-23-6 Thin, TSOT-23-6", Type=Standard
U202: library part #1-054, Manufacturer 1="Texas Instruments", Manufacturer Part Number 1=BQ24250RGET, Package="VQFN-24 Texas Instruments", Supplier Part Number 1=296-36180-1-ND, <Termination>=SMD, AL-PN=#1-054, Check_prices=https://www.snapeda.com/parts/BQ24250RGET/Texas+Instruments/view-part/?ref=eda, Creator Project=DAP, Lead Time="16 Weeks", MF="Texas Instruments", MP=BQ24250RGET, PartType=IC, SnapEDA_Link=https://www.snapeda.com/parts/BQ24250RGET/Texas+Instruments/view-part/?ref=snap, Status=Verified, SubType=Charger, Supplier 1=Digikey, Supplier Label="Charger IC Lithium Ion 24-VQFN (4x4)", Type=Standard
U203: library part #1-052, Manufacturer 1="Analog Devices", Manufacturer Part Number 1=LT3093EDD#TRPBF, Manufacturer_Name="Analog Devices Inc", Supplier Part Number 1=505-LT3093EDD#TRPBFCT-ND, <Termination>=SMD, AL-PN=#1-052, Copyright="Copyright (C) 2026 Ultra Librarian. All rights reserved.", Creator Project=DAP, Lead Time="21 Weeks", Manufacturer_Part_Number=LT3093EDD#TRPBF, PartType=IC, RefDes=RefDes, Status=Verified, SubType=LDO, Supplier 1=Digikey, Supplier Label="Linear Voltage Regulator IC Negative Adjustable 1 Output 200mA 12-DFN (3x3)", Type=Standard
U204 U206: library part #1-051, Manufacturer 1="Analog Devices", Manufacturer Part Number 1=LT3042EDD#PBF, Package="DFN-10 Linear Technology", Supplier Part Number 1=505-LT3042EDD#PBF-ND, <Termination>=SMD, AL-PN=#1-051, Check_prices=https://www.snapeda.com/parts/LT3042EDD%23PBF/Analog+Devices/view-part/?ref=eda, Creator Project=DAP, Lead Time="21 Weeks", MF="Analog Devices", MP=LT3042EDD#PBF, PartType=IC, SnapEDA_Link=https://www.snapeda.com/parts/LT3042EDD%23PBF/Analog+Devices/view-part/?ref=snap, Status=Verified, SubType=LDO, Supplier 1=Digikey, Supplier Label="Linear Voltage Regulator IC Positive Adjustable 1 Output 200mA 10-DFN (3x3)", Type=Standard
U300: library part #1-124, <Rating>=133MHz, <Value>=64Bit, Manufacturer 1="Gigadevice Electronics Singapore PTE.LTD.", Manufacturer Part Number 1=GD25B64EWIGR, Supplier Part Number 1=1970-GD25B64EWIGRCT-ND, <Termination>=SMD, AL-PN=#1-124, Creator Project=DAP, Lead Time=N/A, PartType=IC, Status=Verified, SubType=FLASH, Supplier 1=Digikey, Supplier Label="FLASH - NOR (SLC) Memory IC 64Mbit SPI - Quad I/O 133 MHz 7 ns 8-WSON (5x6)", Type=Standard
U301: library part #1-055, Manufacturer 1="Espressif Technologies", Package=None, Supplier Part Number 1=1965-ESP32-S3-ND, <Termination>=SMD, AL-PN=#1-055, Availability="In Stock", Check_prices=https://www.snapeda.com/parts/ESP32-S3/Espressif+Systems/view-part/?ref=eda, Creator Project=DAP, Lead Time="8 Weeks", Manufacturer Part Number 1=ESP32-S3, MF="Espressif Systems", MP=ESP32-S3, PartType=MCU, Price=None, Purchase-URL=https://pricing.snapeda.com/search/part/ESP32-S3/?ref=eda, SnapEDA_Link=https://www.snapeda.com/parts/ESP32-S3/Espressif+Systems/view-part/?ref=snap, Status=Verified, SubType=ESP-32, Supplier 1=Digikey, Supplier Label="IC RF TxRx + MCU Bluetooth, WiFi 802.11b/g/n, Bluetooth v5.0 2.412GHz ~ 2.484GHz 56-VFQFN Exposed Pad", Type=Standard
U400: library part #1-128, Manufacturer 1="Rohm Semiconductor", Manufacturer Part Number 1=BD1604MUV-E2, Manufacturer_Name="ROHM Semiconductor", Supplier Part Number 1=BD1604MUV-E2CT-ND, <Termination>=SMD, AL-PN=#1-128, Copyright="Copyright (C) 2025 Ultra Librarian. All rights reserved.", Creator Project=DAP, Lead Time="12 Weeks", Manufacturer_Part_Number=BD1604MUV-E2, PartType=IC, RefDes=RefDes, Status=Verified, SubType="LED Driver", Supplier 1=Digikey, Supplier Label="LED Driver IC 4 Output DC DC Regulator Switched Capacitor (Charge Pump) Dimming 30mA VQFN016V3030", Type=Standard
Y100: library part #1-100, <Rating>=2.2mA, <Value>=22.5792MHz, Manufacturer 1="ECS Inc.", Manufacturer Part Number 1=ECS-2520MVLC-225.792-CN-TR, Package=None, Supplier Part Number 1=50-ECS-2520MVLC-225.792-CN-TRCT-ND, <Termination>=SMD, AL-PN=#1-100, Availability=Unavailable, Creator Project=DAP, Lead Time="19 Weeks", MP=ASTX-H11-24.576MHZ-T, PartType=Oscillator, Price=None, Status=Verified, SubType=Crystal, Supplier 1=Digikey, Supplier Label="22.5792 MHz XO (Standard) CMOS Oscillator 1.6V ~ 3.6V Enable/Disable 4-SMD, No Lead", Type=Standard
Y101: library part #1-101, <Rating>=5.5mA, <Value>=24.576MHz, Manufacturer 1="Abracon LLC", Manufacturer Part Number 1=ASTX-H11-24.576MHZ-T, Package=None, Supplier Part Number 1=535-12038-1-ND, <Termination>=SMD, AL-PN=#1-101, Availability=Unavailable, Creator Project=DAP, Lead Time="16 Weeks", MP=ASTX-H11-24.576MHZ-T, PartType=Oscillator, Price=None, Status=Verified, SubType=Crystal, Supplier 1=Digikey, Supplier Label="24.576 MHz TCXO HCMOS Oscillator 3.3V Enable/Disable 4-SMD, No Lead", Type=Standard

## Free pads (board coordinates)
  round 196.85 hole 125.98: ""(157.48,157.48) ""(157.48,2007.87) ""(2007.87,157.48) ""(2007.87,2007.87)

## Via types
v1: diameter 19.68, hole 9.84, Top Layer (Sig) to Bottom Layer (Sig), tented both sides, 287 vias
v2: diameter 49.21, hole 29.53, Top Layer (Sig) to Bottom Layer (Sig), 6 vias
v3: diameter 15.75/15.75/15.75/15.75/15.75/15.75 (per signal layer), hole 7.87, Top Layer (Sig) to Bottom Layer (Sig), tented both sides, 5 vias
v4: diameter 23.62, hole 11.81, Top Layer (Sig) to Bottom Layer (Sig), tented both sides, 1 vias

## Nets (pads, with @x,y where several pads share a name; then routed paths per layer and width w, separated by ;. In a path a pad name is that pad's centre, name@x,y a point inside that pad or via, vN(x,y) a via of type N, cw(c..) or ccw(c..) an arc to the next point about the centre after c; other vN are vias at no path point)
22.5792_OUT: R104.1 Y100.3 | length 42.7
  Bottom Layer (Sig) w5.98: Y100.3@1453.5,416 1455.13,414.37 1455.13,374.13 R104.1@1455,374
24.576_OUT: R105.2 Y101.3 | length 49.5
  Bottom Layer (Sig) w5.98: Y101.3@1408.91,324.27 1447.97,324.27 1452,328.3 R105.2@1452,333
40MHz_IN: C308.1 CR300.1 L301.1 | length 95.6
  Top Layer (Sig) w6: CR300.1@1184,840 1184,865.94 1186.16,868.09 1186.16,876.16 L301.1@1193,883 ; CR300.1@1185.67,840.2 1219.3,840.2 1230,850.91 C308.1@1230,851
40MHz_OUT: C310.1 CR300.3 U301.53 | length 217.1
  Top Layer (Sig) w6: C310.1@1099,788 1143.39,788 CR300.3@1144.33,787.06 ; U301.53@1137.8,947.83 1137.8,896.36 1137.72,896.29 1137.72,878.2 1118.33,858.8 1118.33,812.44 1129.98,800.79 1133.21,800.79 CR300.3@1139,795
+3V3_ANALOG: C102.2 C103.2 C104.2 C105.2 C109.2 C111.2 C126.2 C128.2 C129.2 C217.2 R222.2 R251.2 U100.8 U101.8 U102.8 U103.2 U204.9 U204.10 Y100.4 Y101.4 | length 2704.9
  Top Layer (Sig) w7.99: v1(1500,912) 1697,912 1731.84,946.84 1741.15,946.84 R251.2@1747,952.68 1747.96,952.68 1753.81,958.53 1753.81,967.81 1772.76,986.76 1772.76,997.76 v1@1774,999 ; v1(1971,1019) 1971,1015.84 1983,1003.84 R222.2@1983,982
  L4 (Sig) w7.99: v1@1257.84,431 1263.44,425.39 1263.44,424.56 1466,222 1466,187 ; v1(1429.04,186) 1465,186 ; 1463.99,184.99 1471.75,177.23 1494.13,177.23 1521.37,150 1651,150 2082,581 2082,600 1962,720 1882,720 ; v1@1497,912 v1@1499,912 ; v1(1775,998) 1924.11,848.89 1924.11,762.92 ; v1(1873.43,658.84) 1873.43,712.23 1881.6,720.4 ; v1(1942,782) 1942,780.81 1924.11,762.92 ; v1(1971,1019) 2025.69,964.31 2025.69,755.69 1990.4,720.4 1881.6,720.4 ; 1881.6,720.4 1924.11,762.92
  other v1: 1258,434
+3V3_DAC: B100.1 B100.10 B100.12 B100.27 C112.2 C113.2 C114.2 C115.2 C116.2 C119.2 C120.2 C139.2 C231.2 R243.2 U206.9 U206.10 | length 846.8
  Top Layer (Sig) w10: v1(1485.66,287.66) 1485.66,366.66 1532,413 ; R243.2@1503,650.54 1475,622.54 1475,569.78 1532,512.78 1532,413 ; v1(1507,413) 1532,413 ; C231.2@1675.32,551.21 1675.32,469.68 1675.5,469.5 1619,413 1532,413 ; 1675.85,469.15 1694.74,469.15 1704.05,459.84 1745,418.89 v1@1745,403 ; v1(1745,400) 1745,384 v1(1769,360)
+3V3_DIG: B100.13 C121.2 C122.2 C225.2 C227.2 C228.2 C229.2 C300.2 C301.2 C303.2 C304.2 C305.2 C306.2 C307.2 C401.2 C402.2 C403.2 C407.2 C408.2 C409.2 D400.5 D401.5 ENC400.4 J400.7 J400.8 J400.35 J400.40 J400.41 J400.42 J401.4 L300.2 R118.2 R208.2 R209.2 R210.2 R211.2 R223.2 R236.2 R241.2 R242.2 R253.2 R300.2 R301.2 R405.2 R407.2 R414.2 R415.2 R416.2 R417.2 R418.2 R419.1 SW400.2 SW400.4 SW401.2 SW401.4 SW402.2 SW402.4 U205.6 U301.20 U301.46 U301.55 U301.56 | length 10972
  Top Layer (Sig) w10: v1(155.6,762.88) 181.21,762.88 181.37,763.03 J400.35@184.41,763.03 ; R253.2@367,174.32 368.97,174.32 373.81,179.16 373.81,181.13 405.69,213 v1@411.52,213 ; R236.2@409.46,639.96 462.5,693 v1(505.46,693) ; R236.2@410.04,636 413.91,632.13 413.91,612.8 488.27,538.44 C225.2@488.27,535 ; v1@508,693 586,693 767,512 ; v1(653.42,731.92) 819,566.34 819,508.52 ; 971,506.13 971,644 974.5,647.5 1016,689 1053,689 R301.2@1055,687 ; C306.2@1019.13,896.87 1019.63,896.37 1056.63,896.37 v1(1057,896) ; R208.2@1068.28,1436 1071.81,1432.47 1071.81,1430.57 1090.69,1411.69 1128.69,1411.69 ; C307.2@1107,1272.27 1134,1272.27 v4@1134,1277 ; R211.2@1108.28,1434 1136.28,1406 1142,1406 ; v4(1137.99,1277.72) 1195.14,1334.86 ; R209.2@1142,1435 1142,1406 ; R210.2@1223,1441 1218,1436 1218,1357.73 1195.14,1334.86 ; R223.2@1353.69,1259 1354.1,1259.42 1354.1,1299.04 v1(1354.52,1299.45) ; v1@1358,1298.59 1358.99,1297.6 1365.09,1297.6 1395.19,1267.5 1395.19,1265.53 1400.03,1260.69 R241.2@1402,1260.69 ; v1@1607,1877 1623.32,1877 1632.5,1886.19 1634.47,1886.19 1639.32,1891.03 R300.2@1639.32,1893 ; 1142,1406 1142,1388 1195.14,1334.86
  L4 (Sig) w10: v1(155.6,762.88) 155.93,762.55 155.93,748.07 280,624 320,624 ; 238,667 323,752 323,1224.74 v1(243.96,1303.78) ; v1@299,645 320,624 ; v1(415,213.95) 483,281.95 483,459 ; v1@421,2126 421,2125.3 502.3,2044 624.85,2044 741.85,1927 ; v1(714.07,477.7) 714.07,453.07 693,432 611,432 ; ENC400.4@750,1990 741.85,1981.85 741.85,1927 ; v1(856.72,501.1) 922.1,501.1 v1(924,503) 924,663 987.09,726.1 987.09,827.09 ; v1@874,2126 874,2125.16 794,2045.16 794,1969 752,1927 741.85,1927 ; v1(1057,896) 1056,896 987.09,827.09 ; v4@1142,1281 1106.5,1245.5 ; v1(1354.52,1299.45) 1354.52,1296.83 1346.39,1288.7 1346.39,1288.61 1326.39,1268.61 ; v1@1520,1545 1500,1545 1416,1461 ; v1@1605,1874.28 1416,1685.28 1416,1461 ; v1(1930.12,272.36) 1890.61,232.84 1814.84,232.84 1712.65,130.65 1453.5,130.65 1311,273.15 1311,318 1248,381 662,381 611,432 ; 320,624 486,458 585,458 611,432 ; 741.85,1927 741.85,1874.04 763.16,1852.73 763.16,1664.84 946,1482 946,1281.07 1007,1220.07 ; 987.09,827.09 987.09,855 933.84,908.25 933.84,1164.73 989.18,1220.07 1007,1220.07 ; 1007,1220.07 1081.07,1220.07 1106.5,1245.5 ; 1106.5,1245.5 1303.28,1245.5 1326.39,1268.61 ; 1326.39,1268.61 1326.39,1371.39 1416,1461
  Bottom Layer (Sig) w10: C403.2@49,937 49.82,937 53.63,933.19 53.63,920.37 69,905 327,905 358.86,873.14 358.86,864.86 256.88,762.88 v1(155.6,762.88) ; C401.2@50.27,531 50.27,569.27 SW401.4@53,572 ; C403.2@50.27,940 50.27,984.27 SW402.4@54,988 ; SW401.4@53,579 53,584.17 72.47,603.64 72.47,731.6 71.22,732.85 71.22,789.55 SW401.2@56.54,804.24 ; SW402.2@53,1214 53,1310.23 72.22,1329.45 72.22,1337.99 73.47,1339.24 73.47,1510.76 72.22,1512.01 72.22,1520.55 SW400.2@57.54,1535.24 ; SW402.2@56.54,1217.24 59,1214.77 59,1151.96 72.47,1138.49 72.47,1016.64 59,1003.17 SW402.4@59,999 ; v1@420,2128 R407.2@455.32,2128 ; v1@508,693 516,693 ; v1@508.6,693 R414.2@544,728.4 ; R417.2@544,657.28 516,685.28 516,693 ; R416.2@546.63,693 516,693 ; D400.5@643,1961.24 650.46,1968.71 650.46,1990.72 656.32,1996.57 ENC400.4@741.85,1996.57 ; R405.2@838.69,2130 839.69,2129 v1@872,2129 ; R418.2@976.37,688 1007,688 ; R419.1@979,647 979,652.28 1007,680.28 1007,688 ; R415.2@979,727 979,723.4 1014.4,688 ; 1015,688 1007,688 ; v1(1516,1542) 1517.85,1543.85 1525.57,1543.85 1555.72,1574 R118.2@1559,1574
  other v1: 296,646 1299,975 1607.07,1876.35 420.07,2126.23 877.07,2128.23
+3V9: C204.2 C211.2 C220.2 C232.2 L201.1 R200.2 R225.2 R244.2 R250.2 U200.6 U201.6 U204.1 U204.2 U206.1 U206.2 | length 2464
  Top Layer (Sig) w10: R200.2@1063,305.63 1160.63,305.63 1194,339 ; C204.2@1278,372.8 1290.88,385.68 1290.88,555.84 1447,711.96 1447,758.4 1515.92,827.32 1554.17,827.32 ; 1588,835 1580.32,827.32 1554.17,827.32 ; R244.2@1613,825 R244.2@1617.26,820.74 ; C232.2@1669.69,786 C232.2@1669.69,787.97 ; 1892,121 1907,106 R250.2@1907,76.68 ; 2083,809 2031.5,757.5 2031.5,691.5 1960,620 1868,620 1816.64,671.36 1816.64,795.02 1732.66,879 1560.03,879 1554.17,873.14 1554.17,827.32
  Top Layer (Sig) w20: L201.1@1861,166 L201.1@1866.72,160.28
  L4 (Sig) w10: v1@1241.02,326 1241.02,291.98 1465,68 1773,68 1836.78,131.78 v1(1838.28,131.78)
  other v1: 1240.57,326.44
+LED: C400.2 C413.2 J400.1 U400.6 | length 356.5
  Bottom Layer (Sig) w10: v1@222,1571 v1(224,1569) 415,1569 v1(530,1454)
-3V3: C108.2 C110.2 C125.2 C134.2 C135.2 C216.2 R220.2 R252.2 U100.4 U100.9 U101.4 U101.9 U102.4 U102.9 U103.4 U103.11 U203.10 U203.11 U203.12 | length 2756.3
  Top Layer (Sig) w10: R220.2@1744.08,1055.56 1746.05,1055.56 1768.49,1078 1801,1078 1858,1021 1893.38,1021 1893.53,1020.85 1898.85,1020.85 v1@1899,1021 ; R252.2@1821,1255 1825.28,1255 1825.81,1254.47 1825.81,1239.19 1869.01,1196 U103.11@1896.54,1196
  L4 (Sig) w10: v1(1332.91,814.18) 1332.91,910.36 1564.78,1142.22 1666,1243.45 1666,1337 ; 1566,1141 1566,1062 1827,801 ; v1(1570.03,1379.53) 1623.47,1379.53 1666,1337 ; v1(1857,771) 1827,801 ; v1@1898,1020 1898,1119 1868,1149 1868,1281 ; U103.11@1932,1217 1868,1281 ; v1(1973.42,553.49) 1909.52,553.49 1827,636.01 1827,801 ; 1666,1337 1812,1337 1868,1281
  L4 (Sig) w20: v1(1568,1304) 1568,1372 1570.03,1374.03 v1(1570.03,1379.53)
  Bottom Layer (Sig) w10: U101.4@1355.69,810.13 1355.69,844.66 1374.32,863.28 U101.9@1385.22,863.28 ; U102.9@1845,852 1845,852.63 U102.4@1879.76,852.63 ; 1913,1178 1914.25,1178 U103.4@1914.25,1140.88 ; U100.9@1942,576 1943.24,574.76 U100.4@1979.38,574.76
  other v1: 1898,1019
-3V9: C205.2 C206.2 C218.2 L202.2 R201.2 R219.2 R249.2 U203.1 U203.2 | length 1291.9
  Top Layer (Sig) w10: R249.2@1464,237 1464,234.03 1467.84,230.19 1470.81,230.19 1493,208 1526,208
  L4 (Sig) w10: v1(1485,1153) 1485,1106 1225,846 1225,586 1530,281 v1(1530,170.83)
ADDR_DAC: B100.25 R135.1 | length 260.6
  Top Layer (Sig) w6: R135.1@1412.37,136 1436.66,136 1463.85,108.8 v1(1485,108.8)
  Bottom Layer (Sig) w6: v1(1485,108.8) 1487.04,110.84 1503.84,110.84 1590.51,197.51 B100.25@1590.51,232
BAT+: C215.2 J200.1 U202.11 U202.12 | length 604.5
  Top Layer (Sig) w20: J200.1@159.07,1764.21 376.79,1764.21 464.24,1676.76 726.24,1676.76 727,1676
BOOT0: R301.1 R302.1 U301.5 | length 1040.6
  Top Layer (Sig) w6: v1(988,239) 985.38,236.38 985.38,229.02 985,228.64 985,176 1003.19,157.81 1003.19,155.84 1010.03,149 R302.1@1012,149 ; R301.1@1090,687 1091.69,688.69 1116.31,688.69 v1@1118,687 ; v1@1187,1029 1199.98,1041.98 1216.19,1041.98 U301.5@1217.52,1043.31
  L3 (Sig) w6: v1(988,239) 1091,342 1091,657.67 v1@1121.33,688
  Bottom Layer (Sig) w6: v1(1122.02,688.69) 1138,704.67 1138,982.9 1184,1028.9 v1@1184,1030
  other v1: 1184.65,1029.55
BOOT_BQ: C207.2 U202.21 | length 64.7
  Top Layer (Sig) w8: U202.21@960.87,1718.16 1003.16,1718.16 v1(1019,1734)
CD_SD: J401.CD R419.2 U301.45 | length 632.2
  Top Layer (Sig) w6: v1(985.13,1002.88) 1000,988.01 1000,979 1011.81,967.19 U301.45@1011.81,947.83
  Bottom Layer (Sig) w6: J401.CD@936.32,606.79 R419.2@936.32,647 ; J401.CD@936.95,589.07 936.95,606.79 947.17,617 v1(1024,617) 1042,635 1042,738 995,785 995,989.3 985.13,999.18 v1(985.13,1002.88)
CE_BQ: R221.2 U202.1 U301.17 | length 1058
  Top Layer (Sig) w6: U202.1@933.91,1804.18 933.91,1845.91 995,1907 v1(1055,1907) ; U301.17@1153.54,1217.52 1154.87,1218.85 1154.87,1230.74 1154.96,1230.83 1154.96,1237.09 1180.87,1263 1196.39,1263 1257,1323.61 v1(1257,1359) ; R221.2@1179,1476.69 v1(1179,1517)
  L3 (Sig) w6: v1(1055,1907) 1055,1881 1180,1756 v1@1180,1512.75
  Bottom Layer (Sig) w6: v1(1179,1517) 1257,1439 1257,1362 v1@1259,1360
CHIP_PU: C309.2 R300.1 SW300.3 SW300.4 U301.4 | length 1436.9
  Top Layer (Sig) w6: U301.4@1217.52,1027.56 1218.69,1028.73 1234.21,1028.73 1246.48,1041 1314.27,1041 1314.52,1041.25 1320.25,1041.25 C309.2@1324,1045 ; v1(1305,1085) 1317.79,1072.21 1317.79,1066.75 1330.54,1054 C309.2@1332.5,1054 ; C309.2@1345,1053 1347.22,1050.78 C309.2@1347.22,1041.06 ; R300.1@1679.62,1893.69 v1@1715.32,1858 ; R300.1@1681.31,1896.69 SW300.3@1681.31,1940.68 1845.32,1940.68 SW300.4@1846,1940
  Bottom Layer (Sig) w6: v1(1305,1085) 1343.06,1085 1431,1172.94 1431,1643 1647.3,1859.3 v1@1716.3,1859.3
  other v1: 1715.54,1856.3
CLK_SD: D401.6 J401.5 R305.1 | length 363
  Top Layer (Sig) w6: v1@821,723 R305.1@926.04,828.04
  Bottom Layer (Sig) w6: J401.5@767.94,611 819,662.06 v1(819,722) 816.38,724.62 816.38,745.62 798.38,763.62 781.54,763.62 D401.6@770.76,774.4
CMD_SD: D401.4 J401.3 R414.1 U301.42 | length 810.4
  Top Layer (Sig) w6: v1(770,652) 770,725 947.83,902.83 U301.42@947.83,980.32
  L3 (Sig) w7.99: v1(675,541) 767.76,633.76 767.76,649.76 v1(770,652)
  Bottom Layer (Sig) w7.99: R414.1@592.69,731 592.69,729.03 598.53,723.19 599.33,723.19 660,662.51 660,621.25 664.68,616.57 667.33,616.57 J401.3@677.11,606.79 ; v1(675,541) 675,586.96 J401.3@677.11,589.07 ; v1(770,652) 770,698.84 D401.4@770.76,699.6
CS_LCD: J400.38 R413.2 U301.40 | length 889.4
  Top Layer (Sig) w6: J400.38@205,704.06 349.37,704.06 R413.2@352,706.68 389.69,706.68 449.36,766.36 722.36,766.36 881.1,925.1 881.1,963.23 928.26,1010.39 941.17,1010.39 U301.40@944,1013.23
D/CX_LCD: J400.36 U301.37 | length 873.6
  Top Layer (Sig) w6: J400.36@205,743.43 298.43,743.43 401,846 692,846 903.72,1057.72 946.5,1057.72 U301.37@947.83,1059.06
DACL: B100.8 C107.2 R103.1 U101.6 | length 978.4
  L4 (Sig) w5.98: v1(1459,984) 1460.84,984 1636,808.84 1636,427.85 v1(1664.96,398.89)
  Bottom Layer (Sig) w5.98: C107.2@1357.88,965.13 1364.69,971.94 1364.69,1015.1 1384.53,1034.94 1428.06,1034.94 1457.19,1005.81 1457.19,985.81 v1(1459,984) ; C107.2@1359,965.98 1375.38,949.61 U101.6@1375.38,916.43 ; v1@1669.45,399.55 1699.8,369.2 1699.8,351.06 B100.8@1700.75,350.11
DACLB: B100.9 C101.2 R101.1 U101.2 | length 873.4
  L4 (Sig) w5.98: v1(1337,729) 1337,675 1632.94,379.06 1673.18,379.06 1695,400.88 v1(1695,438)
  Bottom Layer (Sig) w5.98: v1(1337,729) 1377.78,729 1406.91,758.13 C101.2@1408.88,758.13 ; U101.2@1395.06,810.13 1395.06,770.89 1406.25,759.7 1410.45,759.7 1422.2,747.94 1422.2,712.2 R101.1@1422,712 ; v1(1695,438) 1716.5,416.5 B100.9@1716.5,350.11
DACR: B100.3 C100.2 R100.1 U100.2 | length 635.6
  Bottom Layer (Sig) w5.98: B100.3@1622.01,350.11 1622.95,351.06 1622.95,406.95 1696,480 1995.54,480 2060.65,545.11 2060.65,561.54 2028,594.18 C100.2@2028,615
DACRB: B100.2 C106.2 R102.1 U100.6 | length 406
  Bottom Layer (Sig) w5.98: B100.2@1606.26,350.11 1606.26,411.98 1766.28,572 R102.1@1774,572 ; R102.1@1774.38,578.13 1805.62,578.13 1813,570.76 C106.2@1813,568 ; C106.2@1818.38,568.64 1818.38,570.61 1842.22,594.45 1871.45,594.45 U100.6@1872,595
DAT0_SD: D401.3 J401.7 R415.1 U301.44 | length 766.9
  Top Layer (Sig) w6: v1(858.03,540.77) 858.03,649.03 995,786 U301.44@995,935.13
  Bottom Layer (Sig) w8: J401.7@850.34,589.07 850.34,545.66 v1@855,541 ; J401.7@850.34,608 850.34,689.82 860.52,700 D401.3@876,700 ; J401.7@854,608 860.12,614.12 860.12,632.1 895.93,667.91 895.93,683.45 923.29,710.81 923.78,710.81 938,725.03 R415.1@938,727
DATA1_DAC: B100.19 U301.11 | length 1630.1
  Top Layer (Sig) w6: U301.11@1217.52,1137.8 1218.85,1139.13 1230.74,1139.13 1230.83,1139.21 1239.73,1139.21 1256.36,1155.84 v1(1320,1155.84)
  L3 (Sig) w6: v1(1320,1155.84) 1379.16,1155.84 1432,1103 1432,381 1721.35,91.65 v1(1721.35,41.84)
  Bottom Layer (Sig) w6: B100.19@1685,232 1685,78.19 v1(1721.35,41.84)
DATA2_DAC: B100.18 U301.12 | length 1697.8
  Top Layer (Sig) w6: U301.12@1217.52,1153.54 1218.85,1154.87 1230.74,1154.87 1230.83,1154.96 1237.09,1154.96 1257.82,1175.69 1342.32,1175.69 1491,1027 1491,982 v1(1508,965)
  L3 (Sig) w6: v1(1508,965) 1570,903 1570,282.84 v1(1811,41.84)
  Bottom Layer (Sig) w6: B100.18@1700.75,232 1700.75,152.09 v1(1811,41.84)
DATA_CLK_DAC: B100.20 U301.9 | length 1660.6
  Top Layer (Sig) w6: U301.9@1217.52,1106.3 1218.85,1107.63 1230.74,1107.63 1230.83,1107.72 1234.46,1107.72 1262.74,1136 1348,1136 v1(1389,1095)
  L3 (Sig) w6: v1(1389,1095) 1389,904 1408,885 1408,359 1457,310 1457,50 v1(1482,25)
  Bottom Layer (Sig) w6: v1(1482,25) 1596,25 1669.25,98.25 B100.20@1669.25,232
DVDD: B100.15 C117.2
EN1_BQ: R209.1 U202.2 | length 513.7
  Top Layer (Sig) w6: v1(914.06,1845) 914.14,1844.92 914.14,1804.26 U202.2@914.22,1804.18 ; v1(1137,1582) 1137,1480.69 R209.1@1141,1476.69
  L3 (Sig) w6: v1(914.06,1845) 914.06,1819.94 970,1764 970,1731 1118.16,1582.84 1136.16,1582.84 v1(1137,1582)
EN2_BQ: R216.2 U202.3 | length 308.7
  Top Layer (Sig) w6: v1(874,1851) 876.4,1851 894.54,1832.87 U202.3@894.54,1804.18 ; v1(1050.56,1942.29) 1050.91,1942.64 1090.64,1942.64 R216.2@1092,1944
  L3 (Sig) w6: v1(874,1851) 891.51,1868.51 975.51,1868.51 v1@1047,1940
EN_DAC_LDO+: R244.1 R247.2 U206.3 | length 114
  Top Layer (Sig) w10: R247.2@1575.32,786.21 1610.21,786.21 R244.1@1612,788 ; R244.1@1617,786 1617.5,786 1635.32,768.18 U206.3@1635.32,717.32
EN_LDO+: R225.1 R231.2 U204.3
ENC_A_1: D400.1 ENC400.1 R400.1 R405.1 | length 380.3
  Bottom Layer (Sig) w10: D400.1@680.4,1866.76 680.4,1872.66 783.35,1975.61 783.35,2013.76 746.62,2050.5 746.62,2089.61 ENC400.1@748,2091 ; ENC400.1@741.85,2095 793.19,2095 796,2092.19 R400.1@796,2092 ; R405.1@798,2132 799.66,2130.34 799.66,2091.03 R400.1@800,2090.69
ENC_B_1: D400.4 ENC400.3 R407.1 R408.2 | length 233.5
  Bottom Layer (Sig) w7.99: R407.1@494.69,2128 494.69,2094.53 498.22,2091 R408.2@500,2091 ; R408.2@498.28,2092 501.28,2095 ENC400.3@545,2095 ; ENC400.3@556,2086 556,2084 605.6,2034.4 D400.4@605.6,1961.24
FB_BB_3.3: C225.1 C226.1 R236.1 R240.2 U205.9
FB_BB_3.9: R200.1 R212.2 R213.2 U200.9 | length 95.9